# Altium PCB FOR_JLCPCB.PcbDoc
Units mm, origin at the board's own origin, x right, y up, seen from the top; angles counter-clockwise.
Board outline 100 x 50 mm, 2 copper layers (Top Layer, Bottom Layer); 48 components, 48 nets, 171 pads, 0 vias.
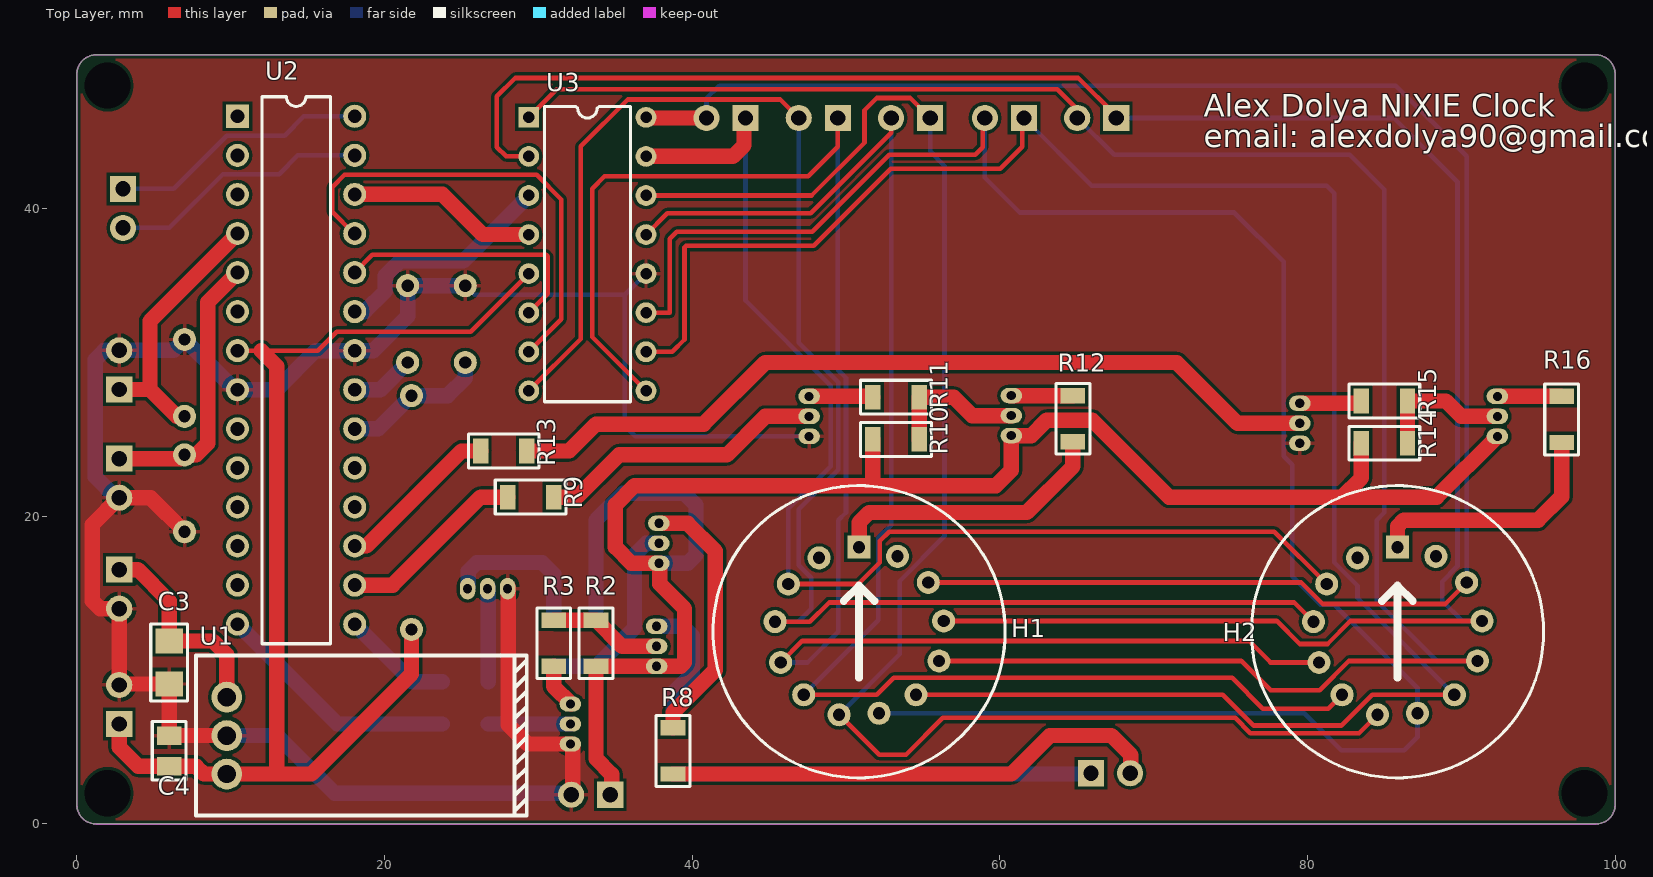
[diagram p0: Top Layer view]
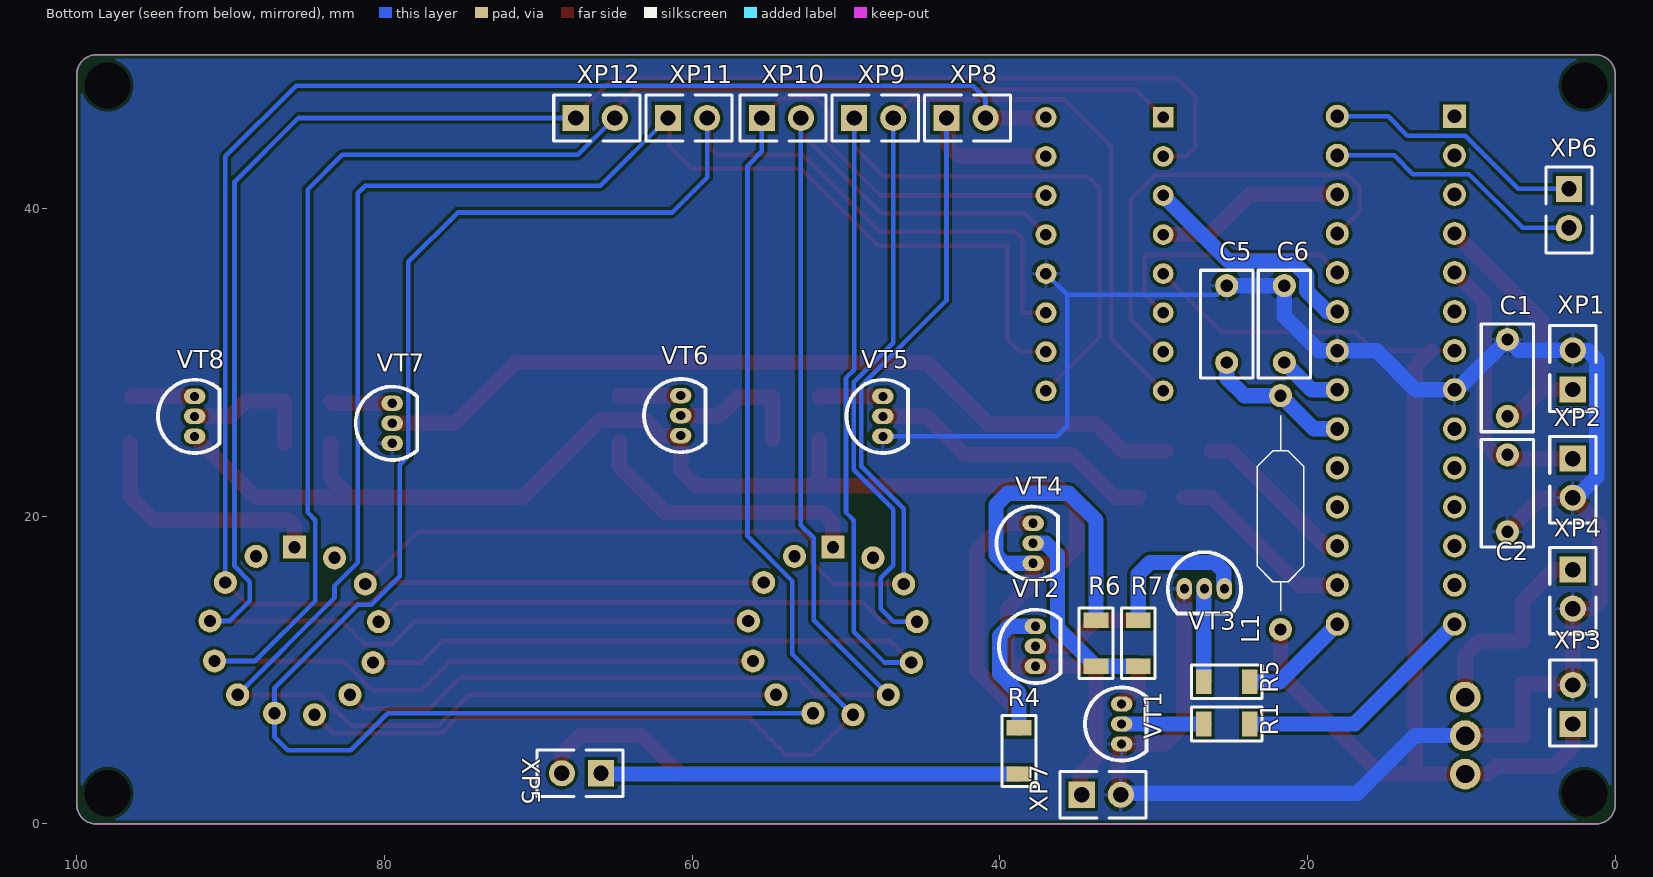
[diagram p1: Bottom Layer view, seen from below]
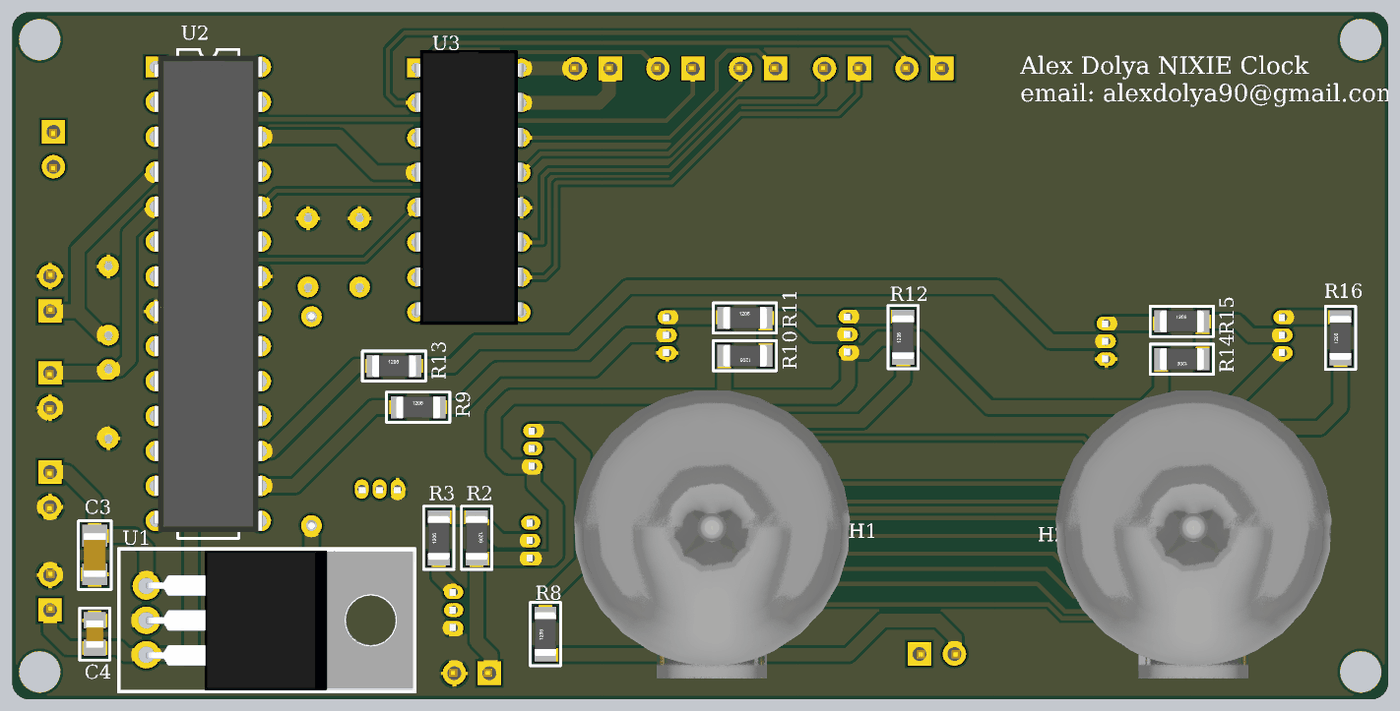
[diagram p2: 3D render of the assembled board from above, using the file's embedded part models]
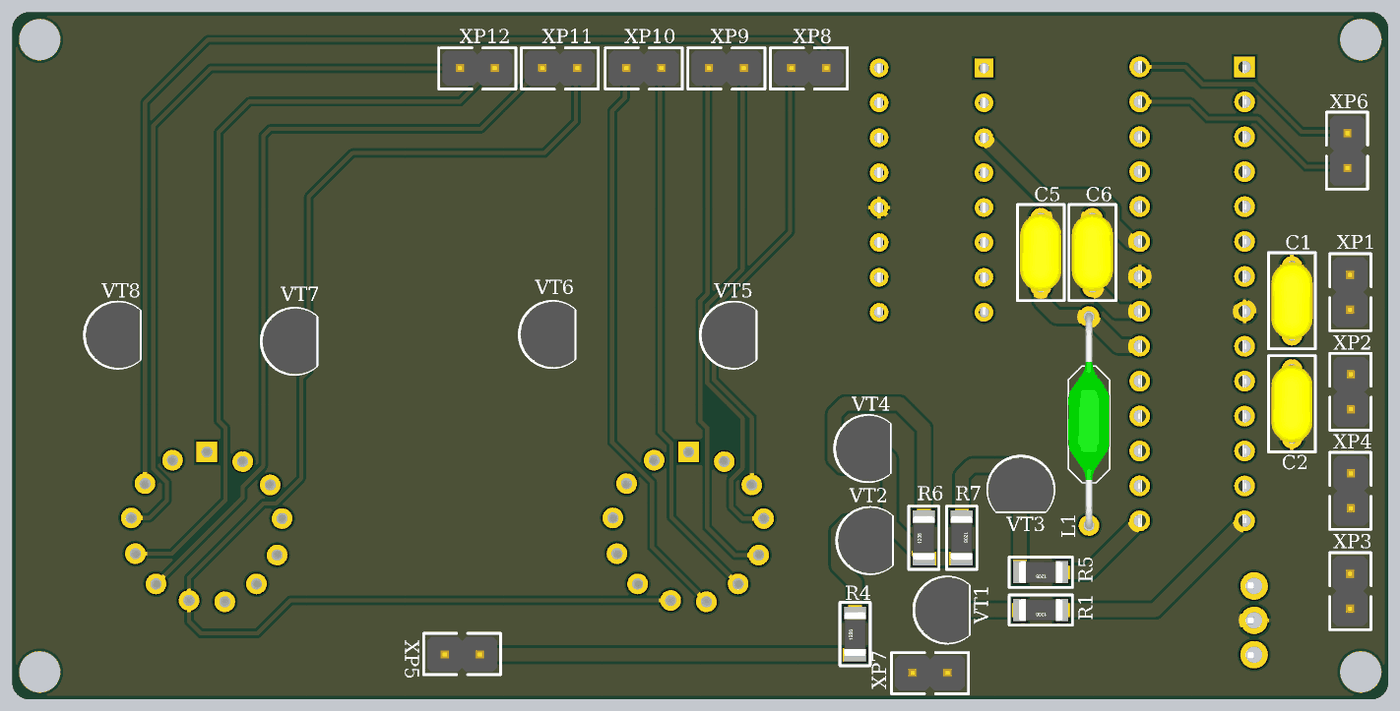
[diagram p3: 3D render of the assembled board from below, using the file's embedded part models]

## Layer stack, top to bottom
Top Solder: solder mask 0.0102, Solder Resist, Dk 3.5
Top Layer: signal copper 0.0356
Dielectric 1: dielectric 0.32, FR-4, Dk 4.8
Bottom Layer: signal copper 0.0356
Bottom Solder: solder mask 0.0102, Solder Resist, Dk 3.5

## Board outline
0,1.25 0,48.75 cw(c1.25,48.75) 1.25,50 98.75,50 cw(c98.75,48.75) 100,48.75 100,1.25 cw(c98.75,1.25) 98.75,0 1.25,0 cw(c1.25,1.25)

## Design rules (kind name [scope] priority, off if disabled: settings)
Clearance [All] p1: gap=0.2 ignorepadtopadclearanceinfootprint=FALSE except(0: Arc-Hole Track-Hole SMDPad-Hole THPad-Hole Via-Hole Fill-Hole Poly-Hole Region-Hole Text-Hole)
Height [All] p1: minheight=0 maxheight=100 prefheight=12.7
PolygonConnect [All] p1: connectstyle=Relief reliefconductorwidth=0.254 reliefentries=4 polygonreliefangle="90 Angle" airgapwidth=0.254
RoutingVias [All] p1: holewidth=0.3 width=0.7 viastyle="Through Hole" minholewidth=0.3 minwidth=0.6 maxholewidth=0.6 maxwidth=1.2
SolderMaskExpansion [All] p1: expansion=0.102
Width [All] p1: maxlimit=1 minlimit=0.15 preferedwidth=0.3
29 further rules are at their usual default settings.

## Components (designator, comment, footprint, x,y, rotation, side; value= is the part's Value field where it differs from the comment)
C1 "0.1u" C_AXIAL_K10-17 7,29 r270 bottom
C2 "0.1u" C_AXIAL_K10-17 7,21.5 r90 bottom
C3 "2.2u" C1206 6,10.5 r90 top
C4 "1u" C0805 6,4.75 r270 top
C5 "0.1u" C_AXIAL_K10-17 25.25,32.5 r90 bottom
C6 "0.1u" C_AXIAL_K10-17 21.5,32.5 r90 bottom
H1 "*" IN-14 50.85,12.5 r0 top
H2 "*" IN-14 85.85,12.5 r0 top
L1 "120" INDUCTOR_AXIAL 21.75,20.25 r90 bottom
R1 "10k" R1206 25.25,6.5 r0 bottom
R2 "10k" R1206 33.75,11.75 r270 top
R3 "1M" R1206 31,11.75 r90 top
R4 "13k" R1206 38.75,4.75 r90 bottom
R5 "10k" R1206 25.25,9.25 r0 bottom
R6 "10k" R1206 33.75,11.75 r90 bottom
R7 "1M" R1206 31,11.75 r270 bottom
R8 "13k" R1206 38.75,4.75 r90 top
R9 "10k" R1206 29.5,21.25 r0 top
R10 "10k" R1206 53.25,25 r180 top
R11 "1M" R1206 53.25,27.75 r0 top
R12 "13k" R1206 64.75,26.35 r90 top
R13 "10k" R1206 27.75,24.25 r0 top
R14 "10k" R1206 85,24.75 r180 top
R15 "1M" R1206 85,27.5 r0 top
R16 "13k" R1206 96.525,26.3 r90 top
U1 "КР142ЕН5В" TO-220_HORIZONTAL 9.75,5.75 r270 top
U2 "ATMEGA 328P PU" DIP28 14.25,29.5 r270 top
U3 "КД155ИД1" DIP16 33.19,37.05 r270 top
VT1 "MPSA42" TO-92 32.485,6.5 r270 bottom
VT2 "MPSA92" TO-92 38.085,11.55 r270 bottom
VT3 "MPSA42" TO-92 26.7,15.7 r0 bottom
VT4 "MPSA92" TO-92 38.235,18.25 r270 bottom
VT5 "MPSA42" TO-92 48,26.5 r270 bottom
VT6 "MPSA92" TO-92 61.15,26.55 r270 bottom
VT7 "MPSA42" TO-92 79.9,26.05 r270 bottom
VT8 "MPSA92" TO-92 92.75,26.5 r270 bottom
XP1 "Кнопка 1" 2_PIN_INPUT 2.75,29.52 r270 bottom value=Connector
XP2 "Кнопка 2" 2_PIN_INPUT 2.75,22.48 r90 bottom value=Connector
XP3 "+5В" 2_PIN_INPUT 2.75,7.77 r270 bottom value=Connector
XP4 "+12В" 2_PIN_INPUT 2.75,15.27 r90 bottom value=Connector
XP5 "Аноды" 2_PIN_INPUT 67.2,3.3 r180 bottom value=Connector
XP6 "DS1307" 2_PIN_INPUT 3,40.02 r90 bottom value=Connector
XP7 "+180В" 2_PIN_INPUT 33.4,1.9 r0 bottom value=Connector
XP8 "Цифры 0-1" 2_PIN_INPUT 42.2,45.9 r0 bottom value=Connector
XP9 "Цифры 2-3" 2_PIN_INPUT 48.2,45.9 r0 bottom value=Connector
XP10 "Цифры 4-5" 2_PIN_INPUT 54.2,45.9 r0 bottom value=Connector
XP11 "Цифры 6-7" 2_PIN_INPUT 60.3,45.9 r0 bottom value=Connector
XP12 "Цифры 8-9" 2_PIN_INPUT 66.3,45.9 r0 bottom value=Connector

## Footprints (in the part's own frame and the unit in brackets; to place one, negate y for a bottom-side part, rotate by r counter-clockwise, add the part's x,y. Pads: shape width x height; smd on the part's side, far side on the other; paste and mask are expansions set on the pad)
2_PIN_INPUT [mm]
  rect 1.7x1.7 hole 1: 1(1.27,0)
  round 1.7 hole 1: 2(-1.27,0)
  silkscreen extent -2.9,-1.5 2.7,1.5, body extent -2.64,-1.3 2.44,1.24, height 6.44
C0805 [mm] "2012M"
  rect 1.2x1.6 smd: 1(-1,0) 2(1,0)
  silkscreen extent -1.9,-1.1 1.9,1.1, body extent -1,-0.62 1,0.63, height 1.01
C1206 [mm] "3216M"
  rect 1.6x1.8 smd: 1(-1.4,0) 2(1.4,0)
  silkscreen extent -2.5,-1.2 2.5,1.2, body extent -1.6,-0.8 1.6,0.8, height 1.01
C_AXIAL_K10-17 [mm]
  round 1.5 hole 0.8: 1(-2.5,0) 2(2.5,0)
  silkscreen extent -3.5,-1.7 3.5,1.7, body extent -2.8,-1.5 2.8,1.5, height 7
DIP16 [mm]
  rect 1.35x1.35 hole 0.75: 1(-8.89,-3.81)
  round 1.35 hole 0.75: 2(-6.35,-3.81) 3(-3.81,-3.81) 4(-1.27,-3.81) 5(1.27,-3.81) 6(3.81,-3.81) 7(6.35,-3.81) 8(8.89,-3.81) 9(8.89,3.81) 10(6.35,3.81) 11(3.81,3.81) 12(1.27,3.81) 13(-1.27,3.81) 14(-3.81,3.81) 15(-6.35,3.81) 16(-8.89,3.81)
  silkscreen extent -9.6,-2.8 9.6,2.8, body extent -10.2,-3.94 9.8,3.93, height 6.1
DIP28 [mm]
  rect 1.5x1.5 hole 0.9: 1(-16.51,-3.81)
  round 1.5 hole 0.9: 2(-13.97,-3.81) 3(-11.43,-3.81) 4(-8.89,-3.81) 5(-6.35,-3.81) 6(-3.81,-3.81) 7(-1.27,-3.81) 8(1.27,-3.81) 9(3.81,-3.81) 10(6.35,-3.81) 11(8.89,-3.81) 12(11.43,-3.81) 13(13.97,-3.81) 14(16.51,-3.81) 15(16.51,3.81) 16(13.97,3.81) 17(11.43,3.81) 18(8.89,3.81) 19(6.35,3.81) 20(3.81,3.81) 21(1.27,3.81) 22(-1.27,3.81) 23(-3.81,3.81) 24(-6.35,3.81) 25(-8.89,3.81) 26(-11.43,3.81) 27(-13.97,3.81) 28(-16.51,3.81)
  silkscreen extent -17.78,-2.23 17.78,2.23, body extent -17.32,-3.95 17.33,3.95, height 5.04
IN-14 [mm]
  rect 1.5x1.5 hole 0.8: 1(0,5.5)
  round 1.5 hole 0.8: 2(-2.6,4.8) 3(-4.6,3.1) 4(-5.461,0.656) 5(-5.1,-2) 6(-3.6,-4.1) 7(-1.3,-5.4) 8(1.3,-5.3) 9(3.7,-4.1) 10(5.2,-1.9) 11(5.5,0.7) 12(4.5,3.2) 13(2.5,4.9)
  silkscreen extent -9.5,-9.5 9.5,9.5, body extent -10.04,-11 10.04,10.05, height 61.33
INDUCTOR_AXIAL [mm]
  round 1.5 hole 0.8: 1(-7.6,0) 2(7.6,0)
  silkscreen extent -6.4,-1.5 6.3,1.5, body extent -7.87,-1.5 7.87,1.5, height 3
R1206 [mm]
  rect 1x1.6 smd: 1(-1.5,0) 2(1.5,0)
  silkscreen extent -2.3,-1.1 2.3,1.1, body extent -1.6,-0.8 1.6,0.8, height 1
TO-92 [mm]
  oval 1x1.4 hole 0.6: 1(1.3,0.4) 2(0,0.4) 3(-1.3,0.4)
  silkscreen extent -2.38,-1.97 2.38,2.02, body extent -2.4,-1.92 2.4,2.01, height 8
TO-220_HORIZONTAL [mm]
  round 2 hole 1.2: 1(-2.5,0) 2(0,0) 3(2.5,0)
  silkscreen extent -5.2,-2 5.2,19.5, body extent -5.08,0 5.08,19.49, height 4.7

## Part data
C1 C2 C3 C4 C5 C6: library part CAPACITOR
  C4: URL=https://www.chipdip.ru/product/grm21br71c105k
H1 H2: library part IN-14
L1: library part INDUCTOR
R1 R2 R3 R4 R5 R6 R7 R8 R9 R10 R11 R12 R13 R14 R15 R16: library part RESISTOR, CASE=1206
  R1 R2 R5 R6 R9 R10 R13 R14: URL=https://www.chipdip.ru/product0/9000079659
  R3 R7 R11 R15: URL=https://www.chipdip.ru/product0/690816980
  R4 R8 R12 R16: URL=https://www.chipdip.ru/product0/9000079662
U1: library part VOLTAGE_REGULATOR, MODEL=КР142ЕН5В
U2: library part ATMEGA_328P_PU, MODEL="ATMEGA 328P PU"
U3: library part K155ID1, MODEL=КД155ИД1
VT1 VT3 VT5 VT7: library part TRANSISTOR_BJT_NPN, MODEL=MPSA42
VT2 VT4 VT6 VT8: library part TRANSISTOR_BJT_PNP, MODEL=MPSA92
XP1 XP2 XP3 XP4 XP5 XP6 XP7 XP8 XP9 XP10 XP11 XP12: library part Con-2-M, TYPE=Вилка
  XP1 XP2 XP3 XP4 XP5 XP7 XP8 XP9 XP10 XP11 XP12: Published=07.03.2013, Publisher="Andrew Danich"
  XP6: URL=https://www.chipdip.ru/product/pls-40

## Free pads (board coordinates)
  round 1.5 hole 3: ""(2,2) ""(2,48) ""(98,2) ""(98,48)

## Nets (pads, with @x,y where several pads share a name; then routed paths per layer and width w, separated by ;. In a path a pad name is that pad's centre, name@x,y a point inside that pad or via, vN(x,y) a via of type N, cw(c..) or ccw(c..) an arc to the next point about the centre after c; other vN are vias at no path point)
180V_PWR: R2.2 R6.2 R10.2 R14.2 VT2.1 VT4.1 VT6.1 VT8.1 XP7.1 | length 119.3
  Top Layer w1: XP7.1@34.77,2 34.77,3.23 33.75,4.25 R2.2 VT2.1 39.25,10.25 39.5,10.5 39.5,14 37.9,15.6 VT4.1@37.9,16.95 ; VT4.1 36.05,16.95 35,18 35,20.75 36.25,22 51.5,22 ; R10.2 51.75,22.25 51.5,22 ; R14.2 83.5,22.5 82.25,21.25 ; VT8.1 88.4,21.25 82.25,21.25 ; 51.5,22 59.75,22 60.75,23 VT6.1 62.05,25.25 63.05,26.25 66,26.25 71,21.25 82.25,21.25
  Bottom Layer w1: R6.2 33.75,19.75 35.5,21.5 39.5,21.5 40.25,20.75 40.25,17.5 39.7,16.95 VT4.1@37.9,16.95
+5V: C4.2 L1.1 U1.3 U2.7 U3.5 XP3.1 | length 75.8
  Top Layer w0.3: U2.7 11.98,30.77 15.67,30.77 16.9,32 25.6,32 U3.5
  Top Layer w1: XP3.1 2.75,5 4,3.75 C4.2 7.75,3.75 8.25,3.25 U1.3 13,3.25 ; 11.98,30.77 13,29.75 13,3.25 ; L1.1 21.75,9.75 15.25,3.25 13,3.25
+12V: C3.2 U1.1 XP4.1 | length 13.6
  Top Layer w1: XP4.1 3.96,16.54 6,14.5 C3.2 8.85,11.9 9.75,11 U1.1
A0: U2.23 U3.3 | length 15
  Bottom Layer w1: U2.23 18.71,33.31 20.05,34.65 20.05,35.651 20.999,36.6 25.12,36.6 U3.3
A1: U2.24 U3.6 | length 17.2
  Top Layer w0.3: U2.24 19.21,37 30.5,37 30.6,36.9 30.6,34.46 U3.6
A2: U2.25 U3.7 | length 30.3
  Top Layer w0.3: U2.25 18.01,38.39 16.6,39.8 16.6,41.4 17.4,42.2 29.9,42.2 31.5,40.6 31.5,32.82 U3.7
A3: U2.26 U3.4 | length 12.4
  Top Layer w1: U2.26 23.77,40.93 26.38,38.32 U3.4
BUTTON_1: C1.2 U2.4 XP1.1 | length 17.5
  Top Layer w1: XP1.1 4.75,28.25 ; C1.2 6.5,26.5 4.75,28.25 ; U2.4 4.75,32.7 4.75,28.25
BUTTON_2: C2.2 U2.5 XP2.1 | length 18.1
  Top Layer w1: XP2.1 6.75,23.75 C2.2 7.75,24 8.5,24.75 8.5,33.91 U2.5
GND: C1.1 C2.1 C3.1 C4.1 C5.2 C6.2 U1.2 U2.8 U2.22 U3.12 VT1.1 VT3.1 VT5.1 VT7.1 XP1.2 XP2.2 XP3.2 XP4.2 XP7.2 | length 143.7
  Top Layer w1: C2.1 4.79,21.21 XP2.2 1,19.46 1,14.5 1.5,14 XP4.2 XP3.2 2.81,9.1 C3.1 C4.1 U1.2 ; VT3.1@28.05,15.4 28.05,6.45 29.3,5.2 VT1.1 32.15,5.2 32.23,5.12 XP7.2@32.23,2
  Bottom Layer w0.3: C5.2 25.85,34.4 35.62,34.4 ; U3.12 35.62,34.4 ; VT5.1 36.3,25.2 35.62,25.88 35.62,34.4
  Bottom Layer w1: XP2.2 2.55,21.21 1.2,22.56 1.2,30.2 1.79,30.79 XP1.2 6.29,30.79 C1.1 10.27,28.23 U2.8 12.98,28.23 15.52,30.77 U2.22 19.27,30.77 21.5,33 C6.2 C5.2 ; U1.2 13,5.75 16.75,2 XP7.2@32.23,2
NetC5_1: C5.1 L1.2 U2.20 | length 9.6
  Bottom Layer w1: U2.20 19.59,25.69 L1.2 24.1,27.85 25.25,29 C5.1
NetC6_1: C6.1 U2.21 | length 4.2
  Bottom Layer w1: U2.21 19.73,28.23 C6.1
NetH1_1: H1.1 R12.1 | length 18.6
  Top Layer w1: H1.1 50.85,19.6 51.5,20.25 61.75,20.25 64.75,23.25 R12.1
NetH2_1: H2.1 R16.1 | length 16.3
  Top Layer w1: H2.1 85.85,19.35 86.25,19.75 95,19.75 96.525,21.275 R16.1
NetR1_1: R1.1 U2.14 | length 16
  Bottom Layer w1: U2.14 16.93,6.5 R1.1
NetR1_2: R1.2 VT1.2 | length 5.4
  Bottom Layer w1: R1.2 VT1.2 VT1.2@32.15,6.5
NetR2_1: R2.1 R3.2 VT2.2 | length 7.5
  Top Layer w1: R3.2 R2.1 35.45,11.55 VT2.2 VT2.2@37.75,11.55
NetR3_1: R3.1 VT1.3 | length 2.9
  Top Layer w1: R3.1 31,8.95 VT1.3@32.15,7.8
NetR4_1: R4.1 XP5.1 | length 27.2
  Bottom Layer w1: R4.1 XP5.1@65.98,3.25
NetR4_2: R4.2 VT2.3 | length 9
  Bottom Layer w1: VT2.3@37.75,12.85 39.4,12.85 40,12.25 40,9.75 38.75,8.5 R4.2
NetR5_1: R5.1 U2.15 | length 7.2
  Bottom Layer w1: U2.15 21.8,9.25 R5.1
NetR5_2: R5.2 VT3.2 | length 6.2
  Bottom Layer w1: R5.2 VT3.2@26.75,15.4
NetR6_1: R6.1 R7.2 VT4.2 | length 13
  Bottom Layer w1: R7.2 R6.1 36.25,12.75 36.25,17.5 37,18.25 VT4.2 VT4.2@37.9,18.25
NetR7_1: R7.1 VT3.3 | length 10.1
  Bottom Layer w1: VT3.3@25.45,15.4 25.45,16.45 26,17 30.25,17 31,16.25 R7.1
NetR8_1: R8.1 XP5.2 | length 32.6
  Top Layer w1: R8.1 60.75,3.25 63.25,5.75 67.25,5.75 68.52,4.48 XP5.2@68.52,3.25
NetR8_2: R8.2 VT4.3 | length 17
  Top Layer w1: VT4.3@37.9,19.55 39.7,19.55 41.5,17.75 41.5,10 38.75,7.25 R8.2
NetR9_1: R9.1 U2.16 | length 12.3
  Top Layer w1: U2.16 20.53,15.53 26.25,21.25 R9.1
NetR9_2: R9.2 VT5.2 | length 18.8
  Top Layer w1: R9.2 32.5,21.25 35.25,24 42.25,24 44.75,26.5 VT5.2
NetR10_1: R10.1 R11.2 VT6.2 | length 9.2
  Top Layer w1: R10.1 R11.2 57,27.75 58.2,26.55 VT6.2
NetR11_1: R11.1 VT5.3 | length 4.2
  Top Layer w1: VT5.3 51.7,27.8 R11.1
NetR12_2: R12.2 VT6.3 | length 4
  Top Layer w1: VT6.3 R12.2
NetR13_1: R13.1 U2.17 | length 10.7
  Top Layer w1: U2.17 18.82,18.07 25,24.25 R13.1
NetR13_2: R13.2 VT7.2 | length 54.3
  Top Layer w1: R13.2 32,24.25 33.75,26 40.75,26 44.75,30 71.5,30 75.45,26.05 VT7.2
NetR14_1: R14.1 R15.2 VT8.2 | length 9
  Top Layer w1: R14.1 R15.2 89,27.5 90,26.5 VT8.2
NetR15_1: R15.1 VT7.3 | length 4.1
  Top Layer w1: VT7.3 83.35,27.35 R15.1
NetR16_2: R16.2 VT8.3 | length 4.1
  Top Layer w1: VT8.3 R16.2@96.45,27.8
Num0: H1.12 H2.12 U3.16 XP8.2 | length 120.7
  Top Layer w0.3: H1.12 79.594,15.7 80.994,14.3 88.95,14.3 H2.12
  Top Layer w1: U3.16 37.04,45.9 XP8.2@40.83,45.9
  Bottom Layer w0.3: XP8.2 40.93,47.18 41.75,48 85.75,48 90.35,43.4 H2.12
Num1: H1.3 H2.3 U3.15 XP8.1 | length 80.8
  Top Layer w0.3: H1.3 50.8,15.6 52.2,17 52.2,18.4 52.8,19 77.85,19 H2.3
  Top Layer w1: U3.15 42.65,43.4 43.37,44.12 XP8.1@43.37,45.9
  Bottom Layer w0.3: XP8.1 43.47,34.03 49,28.5 49,23.25 46.25,20.5 H1.3
Num2: H1.4 H2.4 U3.8 XP9.2 | length 106.3
  Top Layer w0.3: U3.8 32.75,31.53 32.75,44.05 35.8,47.1 45.73,47.1 XP9.2 ; H1.4 47.656,13.156 48.9,14.4 79.145,14.4 H2.4
  Bottom Layer w0.3: H1.4 46.906,13.156 47.75,14 47.75,16 46.93,16.82 46.93,20.473 49.5,23.043 49.5,28.707 46.93,31.277 XP9.2
Num3: H1.5 H2.5 U3.9 XP9.1 | length 108.1
  Top Layer w0.3: U3.9 33.5,31.66 33.5,41.3 34.3,42.1 47.54,42.1 49.47,44.03 XP9.1 ; H1.5 47.15,11.9 76.2,11.9 77.6,10.5 H2.5
  Bottom Layer w0.3: H1.5 47.5,10.5 49.5,12.5 49.5,19.75 50,20.25 50,29 49.47,29.53 XP9.1
Num4: H1.6 H2.6 U3.13 XP10.2 | length 96.1
  Top Layer w0.3: U3.13 38.38,39.7 47.7,39.7 52.93,44.93 XP10.2 ; H1.6 52,8.4 53.1,9.5 75.1,9.5 77.1,7.5 81.35,7.5 H2.6
  Bottom Layer w0.3: H1.6 52.1,13.25 52.1,18.6 52.93,19.43 XP10.2
Num5: H1.7 H2.7 U3.14 XP10.1 | length 102.9
  Top Layer w0.3: U3.14 47.76,40.86 51.2,44.3 51.2,46.4 52,47.2 54.17,47.2 XP10.1 ; H1.7 52.15,4.5 53.9,4.5 56.3,6.9 75.293,6.9 76.293,5.9 83.35,5.9 H2.7
  Bottom Layer w0.3: H1.7 53.5,11.05 53.5,15.8 56.4,18.7 56.4,42.8 55.47,43.73 XP10.1
Num6: H1.8 H2.8 U3.11 XP11.2 | length 128
  Top Layer w0.3: U3.11 38.54,33.24 38.54,38.04 39,38.5 47.8,38.5 52.8,43.5 58.4,43.5 58.9,44 58.9,45.87 XP11.2@58.93,45.9
  Bottom Layer w0.3: H1.8 79.8,7.2 82.2,4.8 86.3,4.8 87.15,5.65 H2.8 87.15,8.85 81.75,14.25 80.851,14.25 79,16.101 79,23.35 78.45,23.9 78.45,36.55 75.25,39.75 61.31,39.75 59.03,42.03 XP11.2
Num7: H1.9 H2.9 U3.10 XP11.1 | length 130.1
  Top Layer w0.3: U3.10 38.7,30.7 39.5,31.5 39.5,37.5 39.6,37.6 47.9,37.6 52.9,42.6 60.04,42.6 61.47,44.03 XP11.1@61.47,45.9 ; H1.9 74.5,8.4 76.5,6.4 82.2,6.4 84.2,8.4 H2.9
  Bottom Layer w0.3: XP11.1 65.97,41.5 81.25,41.5 81.75,41 81.75,17 83.25,15.5 83.25,14.7 H2.9
Num8: H1.10 H2.10 U3.1 XP12.2 | length 131.1
  Top Layer w0.3: U3.1 31.2,47.76 63.74,47.76 64.93,46.57 XP12.2@64.93,45.9 ; H1.10 75.7,10.6 77.6,8.7 80.8,8.7 82.7,10.6 H2.10
  Bottom Layer w0.3: XP12.2 67.43,43.5 82.75,43.5 85,41.25 85,20.25 84.5,19.75 84.5,14.5 88.4,10.6 H2.10
Num9: H1.11 H2.11 U3.2 XP12.1 | length 138.5
  Top Layer w0.3: U3.2 27.9,43.4 27.3,44 27.3,47.3 28.5,48.5 65.1,48.5 67.47,46.13 XP12.1@67.47,45.9 ; H1.11 78,13.2 79.5,11.7 81.3,11.7 82.8,13.2 H2.11
  Bottom Layer w0.3: XP12.1 85.6,45.9 89.75,41.75 89.75,16.75 88.75,15.75 88.75,14.5 90.05,13.2 H2.11
SCL: U2.28 XP6.1 | length 17
  Bottom Layer w0.3: XP6.1 6.29,41.29 9.75,44.75 13.5,44.75 14.76,46.01 U2.28
SDA: U2.27 XP6.2 | length 17
  Bottom Layer w0.3: XP6.2 6,38.75 9.5,42.25 13.15,42.25 14.37,43.47 U2.27
pads on no net: H1.2 H1.13 H2.2 H2.13 U2.1 U2.2 U2.3 U2.6 U2.9 U2.10 U2.11 U2.12 U2.13 U2.18 U2.19

## Polygon pours and split planes (outlines as drawn)
GND on Bottom Layer "Bottom Layer-GND" (solid, remove dead copper, pour order 2): 0,0 0,50 100,50 100,0
GND on Top Layer "Top Layer-GND" (solid, remove dead copper, pour order 0): 0,0 0,50 100,50 100,0

## Keep-outs
Keep-Out Layer:
  lines w0.1: 0,1.25 ccw(c1.25,1.25) 1.25,0 98.75,0 ccw(c98.75,1.25) 100,1.25 100,48.75 ccw(c98.75,48.75) 98.75,50 51,50 1.25,50 ccw(c1.25,48.75) 0,48.75 0,1.25

## Silkscreen, mask and mechanical layers (free items; w line width, h text height)
Top Overlay:
  text "Alex Dolya NIXIE Clock" at 73.25,45.5 h2.5
  text "email: alexdolya90@gmail.com" at 73.25,43.5 h2.5